# Altium PCB RGB_SL.PcbDoc (part 1 of 2)
Units mm, origin at the board's own origin, x right, y up, seen from the top; angles counter-clockwise.
Board outline 50 x 50 mm, 2 copper layers (Top Layer, Bottom Layer); 48 components, 35 nets, 139 pads, 27 vias.
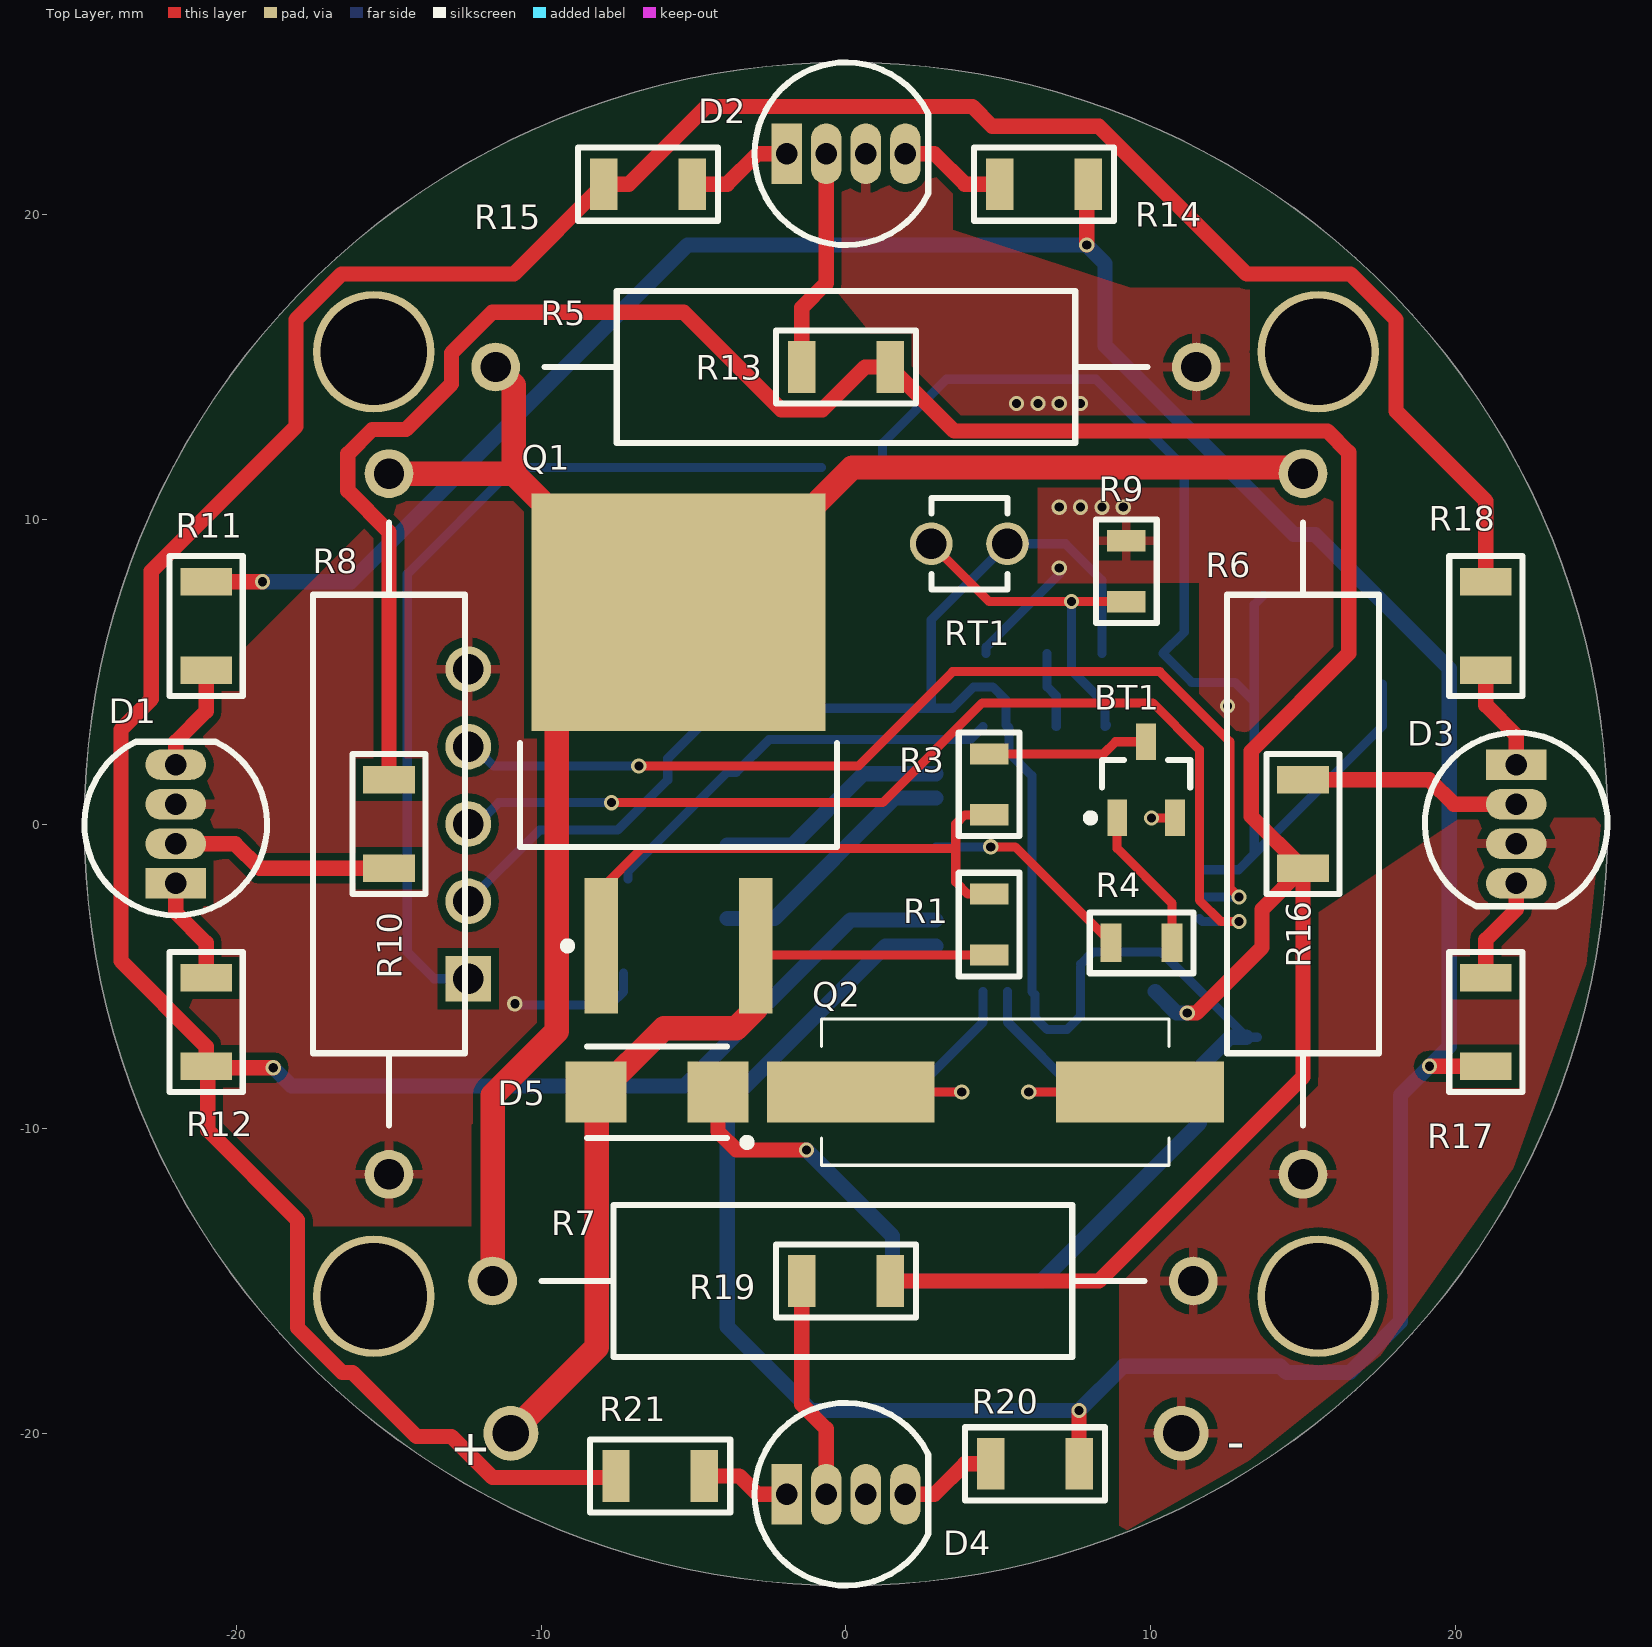
[diagram p0: Top Layer view]
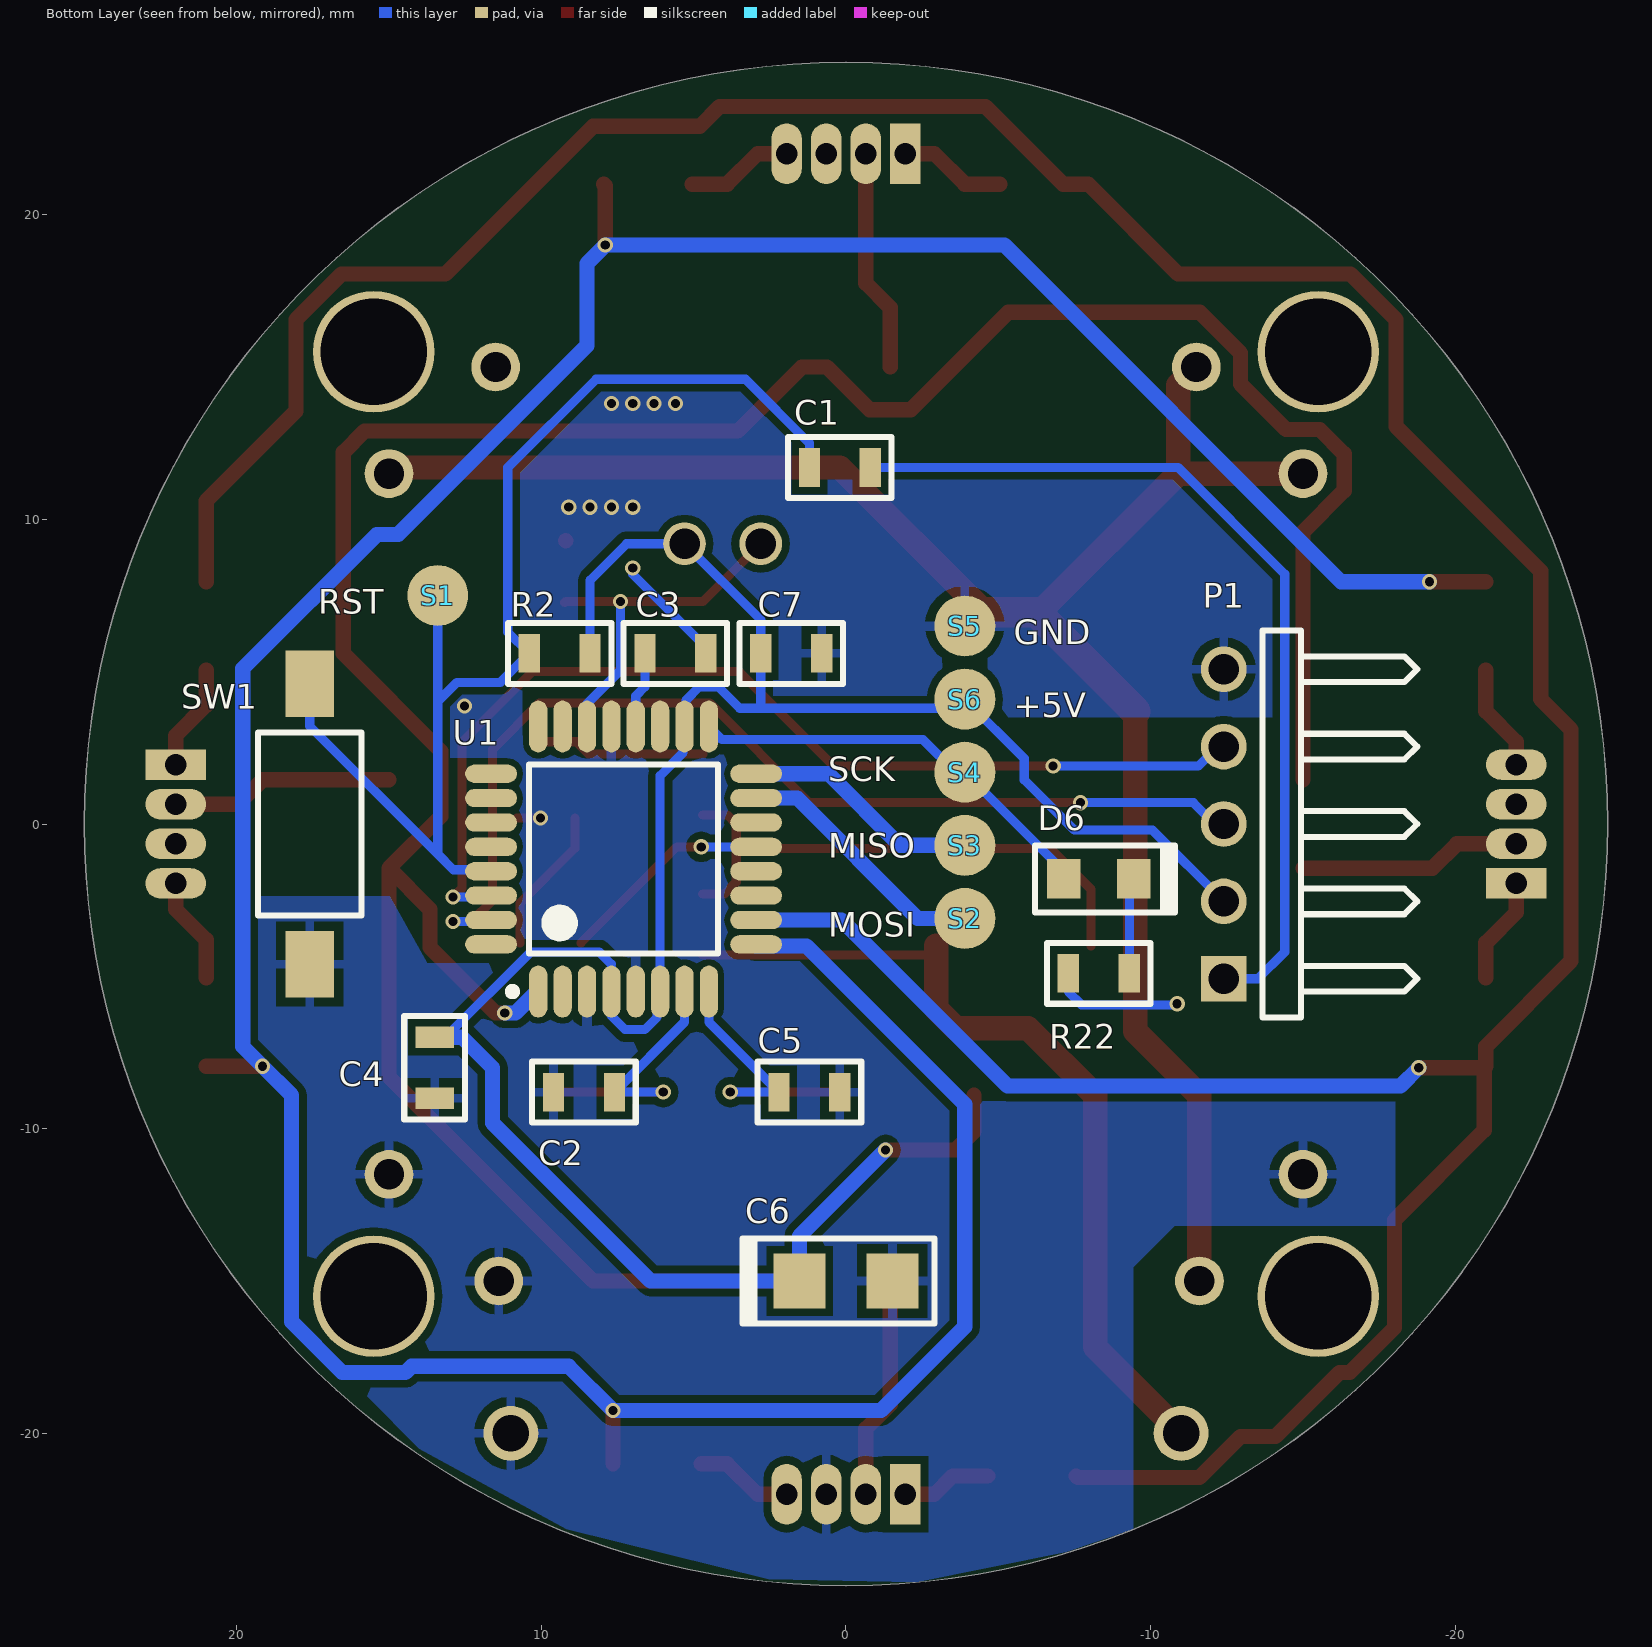
[diagram p1: Bottom Layer view, seen from below]

## Layer stack, top to bottom
Top Solder: solder mask 0.0102, Solder Resist, Dk 3.5
Top Layer: signal copper 0.0356
Dielectric 1: dielectric 0.32, FR-4, Dk 4.8
Bottom Layer: signal copper 0.0356
Bottom Solder: solder mask 0.0102, Solder Resist, Dk 3.5

## Board outline
-25,0 ccw(c0,0) 0,-25 ccw(c0,0) 25,0 ccw(c0,0) 0,25 ccw(c0,0)

## Design rules (kind name [scope] priority, off if disabled: settings)
Clearance Clearance_MCU [InComponent('U1')] p1: gap=0.2 ignorepadtopadclearanceinfootprint=FALSE
Clearance [All] p2: gap=0.25 ignorepadtopadclearanceinfootprint=FALSE
MinimumSolderMaskSliver [All] p1: minsoldermaskwidth=0.2
PolygonConnect [All] p1: thpad.connectstyle=Relief thpad.reliefconductorwidth=0.3 thpad.reliefentries=4 thpad.polygonreliefangle="90 Angle" thpad.airgapwidth=0.3 smdpad.connectstyle=Relief smdpad.reliefconductorwidth=0.3 smdpad.reliefentries=4 smdpad.polygonreliefangle="90 Angle" smdpad.airgapwidth=0.3 via.connectstyle=Direct via.reliefconductorwidth=0.254 via.reliefentries=4 via.polygonreliefangle="90 Angle" via.airgapwidth=0.254
RoutingVias [All] p1: holewidth=0.3 width=0.5 viastyle="Through Hole" minholewidth=0.3 minwidth=0.5 maxholewidth=0.3 maxwidth=0.5
SilkToSilkClearance [All] p1: silktosilkclearance=0
SilkToSolderMaskClearance [IsPad] p1: minsilkscreentomaskgap=0.2 clearancetoexposedcopper=TRUE
SolderMaskExpansion [All] p1: expansion=0.102
Width [All] p1: maxlimit=0.8 minlimit=0.3 preferedwidth=0.3
27 further rules are at their usual default settings.

## Components (designator, comment, footprint, x,y, rotation, side; value= is the part's Value field where it differs from the comment)
BT1 "BC847" SOT95P240X100-3M 9.85,1.45 r90 top
C1 "0.1uF" "0805 CERAMIC CAPACITOR" 0.2,11.7 r180 bottom
C2 "22pF" "0805 CERAMIC CAPACITOR" 8.6,-8.8 r180 bottom
C3 "0.1uF" "0805 CERAMIC CAPACITOR" 5.6,5.6 r0 bottom
C4 "0.1uF" "0805 CERAMIC CAPACITOR" 13.5,-8 r90 bottom
C5 "22pF" "0805 CERAMIC CAPACITOR" 1.2,-8.8 r0 bottom
C6 "10uF 6.3V" "CAP MP3216X16M" 0,-15 r180 bottom
C7 "0.1uF" "0805 Ceramic Capacitor" 1.8,5.6 r0 bottom
D1 "LED RGB" "LED RGB" -22,0 r90 top
D2 "LED RGB" "LED RGB" 0,22 r0 top
D3 "LED RGB" "LED RGB" 22,0 r270 top
D4 "LED RGB" "LED RGB" 0,-22 r0 top
D5 "MBRA210LT3G" DIOM4326X22M -6.2,-8.8 r180 top
D6 "GREEN" "LED G" -8.3,-1.8 r180 bottom
P1 "Header 5H" HDR1X5H -12.4,0 r90 bottom
Q1 "MOSFET P-Ch" DPAK254P1524X483-3M -5.5,2.3 r90 top
Q2 "16MHz" CRYSTAL 4.9,-8.8 r180 top
R1 "4k7" "0805 RES" 4.7,-3.3 r270 top
R2 "10K" "0805 RES" 9.4,5.6 r0 bottom
R3 "1K" "0805 RES" 4.7,1.3 r270 top
R4 "10K" "0805 RES" 9.7,-3.9 r0 top
R5 "2W 11R" "RES T/H 2W" 11.5,15 r180 top
R6 "2W 11R" "RES T/H 2W" 15,-11.5 r90 top
R7 "2W 11R" "RES T/H 2W" 11.4,-15 r180 top
R8 "2W 11R" "RES T/H 2W" -15,-11.5 r90 top
R9 "100K" "0805 RES" 9.2,8.3 r270 top
R10 "270R" "1206 RES" -15,0 r90 top
R11 "100R" "1206 RES" -21,6.5 r90 top
R12 "100R" "1206 RES" -21,-6.5 r270 top
R13 "270R" "1206 RES" 0,15 r0 top
R14 "100R" "1206 RES" 6.5,21 r0 top
R15 "100R" "1206 RES" -6.5,21 r180 top
R16 "270R" "1206 RES" 15,0 r270 top
R17 "100R" "1206 RES" 21,-6.5 r270 top
R18 "100R" "1206 RES" 21,6.5 r90 top
R19 "270R" "1206 RES" 0,-15 r0 top
R20 "100R" "1206 RES" 6.2,-21 r0 top
R21 "100R" "1206 RES" -6.1,-21.4 r180 top
R22 "510R" "0805 RES" -8.3,-4.9 r180 bottom
RT1 "100K" THERMISTOR 2.8,9.2 r0 top
S1 "RST" "TEST PAD" 13.4,7.5 r0 bottom
S2 "MOSI" "TEST PAD" -3.9,-3.1 r0 bottom
S3 "MISO" "TEST PAD" -3.9,-0.7 r0 bottom
S4 "SCK" "TEST PAD" -3.9,1.7 r0 bottom
S5 "GND" "TEST PAD" -3.9,6.5 r0 bottom
S6 "+5V" "TEST PAD" -3.9,4.1 r0 bottom
SW1 "RESET" SWITCH 17.6,0 r90 bottom
U1 "Atmega328P" TQFP80P900X900X120-32M 7.3,-1.15 r90 bottom

## Footprints (in the part's own frame and the unit in brackets; to place one, negate y for a bottom-side part, rotate by r counter-clockwise, add the part's x,y. Pads: shape width x height; smd on the part's side, far side on the other; paste and mask are expansions set on the pad)
"0805 CERAMIC CAPACITOR" [mm]
  rect 0.7x1.27 smd: 1(-1,0) 2(1,0)
  silkscreen extent -1.7,-1 1.7,1, body extent -1,-0.65 1,0.65, height 0.8
"0805 Ceramic Capacitor" [mm]
  rect 0.7x1.27 smd: 1(-1,0) 2(1,0)
  silkscreen extent -1.7,-1 1.7,1, body extent -1,-0.65 1,0.65, height 0.8
"0805 RES" [mm]
  rect 0.7x1.27 smd: 1(-1,0) 2(1,0)
  silkscreen extent -1.7,-1 1.7,1, body extent -1,-0.65 1,0.65, height 0.8
"1206 RES" [mm]
  rect 0.9x1.7 smd: 1(-1.45,0) 2(1.45,0)
  silkscreen extent -2.3,-1.2 2.3,1.2, body extent -1.6,-0.7 1.5,0.8, height 0.55
"CAP MP3216X16M" [mm] "Molded Capacitor, 2-Leads, Body 3.20x1.60mm, IPC Low Density"
  rect 1.7x1.8 smd: 1(-1.525,0) 2(1.525,0)
  silkscreen extent -3.4,-1.5 2.9,1.5, body extent -1.92,-0.9 1.92,0.9, height 1.6
CRYSTAL [mm]
  rect 5.5x2 smd: 1(-4.75,0) 2(4.75,0)
  silkscreen extent -5.7,-2.4 5.7,2.4, body extent -6.7,-2.45 6.7,2.45, height 3.2
DIOM4326X22M [mm] "Molded Diode, 2-Leads, Body 4.31x2.60mm, IPC Low Density"
  rect 2x2 smd: 1(-2,0) 2(2,0)
  silkscreen extent -3.08,-1.5 2.3,1.77, body extent -2.5,-1.46 2.5,1.46, height 2.2
DPAK254P1524X483-3M [mm] "D2-PAK, 3-Pads, Body 7.93x8.57mm (max), IPC Low Density"
  rect 4.45x1.1 smd: 1(-6.3,2.54) 3(-6.3,-2.54)
  rect 7.8x9.65 smd: 4(4.65,0)
  silkscreen extent -6.42,-5.2 0.35,5.2, body extent -6.98,-5.2 8.26,5.2, height 4.83
HDR1X5H [mm] "Connector; Header; 5 Position; Right Angle"
  rect 1.5x1.5 hole 1: 1(-5.08,0)
  round 1.5 hole 1: 2(-2.54,0) 3(0,0) 4(2.54,0) 5(5.08,0)
  silkscreen extent -6.35,-6.35 6.35,-1.27, body extent -6.28,-9.6 6.22,0.2, height 2.5
"LED G" [mm]
  rect 1.1x1.3 smd: 1(-1.15,0) 2(1.15,0)
  silkscreen extent -2.1,-1.1 2.5,1.1, body extent -1.02,-0.65 1.02,0.64, height 1.1
"LED RGB" [mm]
  rect 1x2 hole 0.7: 1(-1.95,0)
  oval 1x2 hole 0.7: 2(-0.65,0) 3(0.65,0) 4(1.95,0)
  silkscreen extent -3,-3 2.7,3, body extent -3.05,-3.05 3.05,3.05, height 12.65
"RES T/H 2W" [mm]
  round 1.6 hole 1: 1(0,0) 2(23,0)
  silkscreen extent 1.6,-2.5 21.4,2.5, body extent -0.5,-4 23.5,3.99, height 12
SOT95P240X100-3M [mm] "SOT23, 3-Leads, Body 2.90x2.40mm, Pitch 0.95mm, IPC Low Density"
  rect 1.2x0.65 smd: 1(-1.25,0.95) 2(-1.25,-0.95) 3(1.25,0)
  silkscreen extent -1.37,-1.45 0.65,1.95, body extent -1.2,-1.45 1.2,1.45, height 1
SWITCH [mm]
  rect 2.18x1.6 smd: 1(-4.6,0) 2(4.6,0)
  silkscreen extent -3,-1.7 3,1.7, body extent -4.7,-1.8 4.7,1.8, height 4.1
"TEST PAD" [mm]
  round 2 smd: 1(0,0)
THERMISTOR [mm]
  round 1.4 hole 1: 1(0,0) 2(2.5,0)
  silkscreen extent 0,-1.5 2.5,1.5, body extent -0.2,-1.15 2.8,1.15, height 11.15
TQFP80P900X900X120-32M [mm] "TQFP, 32-Leads, Body 7.00x7.00mm, Pitch 0.80mm, IPC Low Density"
  oval 1.7x0.6 smd: 1(-4.35,2.8) 2(-4.35,2) 3(-4.35,1.2) 4(-4.35,0.4) 5(-4.35,-0.4) 6(-4.35,-1.2) 7(-4.35,-2) 8(-4.35,-2.8) 17(4.35,-2.8) 18(4.35,-2) 19(4.35,-1.2) 20(4.35,-0.4) 21(4.35,0.4) 22(4.35,1.2) 23(4.35,2) 24(4.35,2.8)
  oval 0.6x1.7 smd: 9(-2.8,-4.35) 10(-2,-4.35) 11(-1.2,-4.35) 12(-0.4,-4.35) 13(0.4,-4.35) 14(1.2,-4.35) 15(2,-4.35) 16(2.8,-4.35) 25(2.8,4.35) 26(2,4.35) 27(1.2,4.35) 28(0.4,4.35) 29(-0.4,4.35) 30(-1.2,4.35) 31(-2,4.35) 32(-2.8,4.35)
  silkscreen extent -4.47,-3.1 3.1,3.77, body extent -4.5,-4.5 4.5,4.5, height 1.2

## Part data
BT1: library part BC847AE6327, "Trans NPN 45V 0.1A Automotive 3-Pin SOT-23 T/R GP BJT", Case/Package=SOT-23-3, Collector Base Voltage (VCBO)=50V, Collector Emitter Breakdown Voltage=45V, Collector Emitter Voltage (VCEO)=600mV, Current Rating=100mA, Emitter Base Voltage (VEBO)=6V, Frequency=250MHz, Manufacturer=Infineon, Max Operating Temperature=150°C, Max Power Dissipation=330mW, Min Operating Temperature=-65°C, Supplier Part Number 1=BC847AE6327HTSA1CT-ND, Category=Transistors, ComponentLink1Description=http://www.infineon.com/dgdl/bc847series_bc848series_bc849series_bc850series.pdf?folderId=db3a304314dca389011541d30fa21656&fileId=db3a304314dca389011541d4630a1657&src-supplier=Avnet, ComponentLink1URL=http://www.infineon.com/dgdl/bc847series_bc848series_bc849series_bc850series.pdf?folderId=db3a304314dca389011541d30fa21656&fileId=db3a304314dca389011541d4630a1657&src-supplier=Avnet, ComponentLink2Description=http://www.mouser.com/ds/2/196/bc847series_bc848series_bc849series_bc850series-55535.pdf?src-supplier=Mouser, ComponentLink2URL=http://www.mouser.com/ds/2/196/bc847series_bc848series_bc849series_bc850series-55535.pdf?src-supplier=Mouser, ComponentLink3Description=https://www.infineon.com/dgdl/Infineon-BC847SERIES_BC848SERIES_BC849SERIES_BC850SERIES-DS-v01_01-en.pdf?fileId=db3a304314dca389011541d4630a1657&src-supplier=Digi-Key, ComponentLink3URL=https://www.infineon.com/dgdl/Infineon-BC847SERIES_BC848SERIES_BC849SERIES_BC850SERIES-DS-v01_01-en.pdf?fileId=db3a304314dca389011541d4630a1657&src-supplier=Digi-Key, ComponentLink4Description=http://components.arrow.com/part/dataview/53356285S7690205N2051?src-supplier=Arrow, ComponentLink4URL=http://components.arrow.com/part/dataview/53356285S7690205N2051?src-supplier=Arrow, ComponentLink5Description=http://components.arrow.com/part/dataview/0323_00171840?src-supplier=Arrow+Europe, ComponentLink5URL=http://components.arrow.com/part/dataview/0323_00171840?src-supplier=Arrow+Europe, ComponentLink6Description=https://www.verical.com/server-webapp/html/getDatasheet?partID=730888&src-supplier=Verical, ComponentLink6URL=https://www.verical.com/server-webapp/html/getDatasheet?partID=730888&src-supplier=Verical, Halogen Free="Not Halogen Free", Lead Free="Lead Free", Manufacturer Part Number=BC847AE6327, Max Breakdown Voltage=45V, Max Collector Current=100mA, Mount="Surface Mount", Number of Elements=1, Number of Pins=3, Packaging="Tape and Reel", Polarity=NPN, Power Dissipation=330mW, Pricing 1="1=0.19, 10=0.175, 100=0.0951, 500=0.0585, 1000=0.0399 (USD)", Radiation Hardening=No, Stock 1=58887, Supplier 1=Digi-Key, Transition Frequency=250MHz, Voltage Rating (DC)=45V
C1 C3 C4: library part VJ0805Y104KXAAT, "Multilayer Ceramic Capacitors MLCC - SMD/SMT .1uF 50volts 10%", Capacitance=100nF, Case/Package=0805, Case Code (Metric)=2012, Dielectric=X7R, Manufacturer="Vishay Vitramon", Max Operating Temperature=125°C, Min Operating Temperature=-55°C, Package Quantity=1, Supplier Part Number 1=720-1383-1-ND, Tolerance=10%, Voltage=50V, Case Code (Imperial)=0805, Category=Capasitors, ComponentLink1Description=http://www.mouser.com/ds/2/427/vjcommercialseries-222796.pdf?src-supplier=Mouser, ComponentLink1URL=http://www.mouser.com/ds/2/427/vjcommercialseries-222796.pdf?src-supplier=Mouser, ComponentLink2Description=http://www.vishay.com/docs/45199/vjcommercialseries.pdf?src-supplier=Digi-Key, ComponentLink2URL=http://www.vishay.com/docs/45199/vjcommercialseries.pdf?src-supplier=Digi-Key, ComponentLink3Description=http://www.vishay.com/docs/45199/vjcommercialseries.pdf?src-supplier=Future+Electronics, ComponentLink3URL=http://www.vishay.com/docs/45199/vjcommercialseries.pdf?src-supplier=Future+Electronics, Depth=1.25mm, Height=1.45mm, Lead Free="Lead Free", Length=2mm, Manufacturer Part Number=VJ0805Y104KXAAT, Mount="Surface Mount", Packaging="Tape and Reel", Pricing 1="1=0.34, 10=0.234, 100=0.1404, 500=0.1053, 1000=0.0889 (USD)", Radiation Hardening=No, REACH SVHC=Unknown, Stock 1=151633, Supplier 1=Digi-Key, Termination=SMD/SMT, Thickness=0.057inch, Voltage Rating=50V, Voltage Rating (DC)=50V, Weight=0.000194oz, Width=0.049inch
C2 C5: library part VJ0805A220JXACW1BC, "0805 22 pF 50 V ±5 % Tolerance C0G/NP0 SMT Multilayer Ceramic Chip Capacitor", Case/Package=0805, Case Code (Metric)=2012, Dielectric=C0G, Dielectric Material=Tantalum, Manufacturer=Vishay, Max Operating Temperature=125°C, Min Operating Temperature=-55°C, Package Quantity=4000, Supplier Part Number 1=720-1601-1-ND, Temperature Coefficient=0ppm/°C, Tolerance=5%, Voltage Rating=50V, Capacitance=22pF, Case Code (Imperial)=0805, Category=Capasitors, ComponentLink1Description=http://www.vishay.com/docs/28548/vjw1bcbascomseries.pdf?src-supplier=Future+Electronics, ComponentLink1URL=http://www.vishay.com/docs/28548/vjw1bcbascomseries.pdf?src-supplier=Future+Electronics, ComponentLink2Description=http://www.vishay.com/docs/28548/vjw1bcbascomseries.pdf?src-supplier=Digi-Key, ComponentLink2URL=http://www.vishay.com/docs/28548/vjw1bcbascomseries.pdf?src-supplier=Digi-Key, Depth=1.25mm, Height=1.45mm, Lead Free="Lead Free", Length=2mm, Manufacturer Part Number=VJ0805A220JXACW1BC, Mount="Surface Mount", Number of Pins=2, Packaging="Tape and Reel", Pricing 1="1=0.19, 10=0.13, 100=0.0661, 500=0.0452, 1000=0.04 (USD)", Radiation Hardening=No, Stock 1=7193, Supplier 1=Digi-Key, Termination=SMD/SMT, Thickness=0.03inch, Voltage Rating (DC)=50V, Width=1.25mm
C6: library part 293D106X96R3A2TE3, "CAP TANT 10UF 6.3V 10% 1206", Capacitance=10uF, Case/Package=1206, Case Code (Metric)=3216, Dielectric Material=Tantalum, ESR (Equivalent Series Resistance)=3.4R, Leakage Current=600nA, Manufacturer="Vishay Sprague", Max Operating Temperature=125°C, Min Operating Temperature=-55°C, Package Quantity=1, Ripple Current=150mA, Supplier Part Number 1=718-1126-1-ND, Tolerance=10%, Voltage=6.3V, Case Code (Imperial)=1206, Category=Capacitors, ComponentLink1Description=http://www.vishay.com/docs/40002/293d.pdf?src-supplier=Avnet, ComponentLink1URL=http://www.vishay.com/docs/40002/293d.pdf?src-supplier=Avnet, ComponentLink2Description=http://www.farnell.com/datasheets/2045658.pdf?src-supplier=Element14, ComponentLink2URL=http://www.farnell.com/datasheets/2045658.pdf?src-supplier=Element14, ComponentLink3Description=http://documents.rs-components.com/techlib://itc_doclist_GB.htm?stockno=6843913&src-supplier=RSComponents, ComponentLink3URL=http://documents.rs-components.com/techlib://itc_doclist_GB.htm?stockno=6843913&src-supplier=RSComponents, ComponentLink4Description=https://www.alliedelec.com/m/d/7dc9f301682605e5c5665c787edb7bb9.pdf?src-supplier=Allied+Electronics, ComponentLink4URL=https://www.alliedelec.com/m/d/7dc9f301682605e5c5665c787edb7bb9.pdf?src-supplier=Allied+Electronics, ComponentLink5Description=http://www.vishay.com/docs/40002/293d.pdf?src-supplier=Digi-Key, ComponentLink5URL=http://www.vishay.com/docs/40002/293d.pdf?src-supplier=Digi-Key, ComponentLink6Description=http://www.mouser.com/ds/2/427/293d-239871.pdf?src-supplier=Mouser, ComponentLink6URL=http://www.mouser.com/ds/2/427/293d-239871.pdf?src-supplier=Mouser, ComponentLink7Description=http://www.vishay.com/docs/40002/293d.pdf?src-supplier=Avnet+Europe, ComponentLink7URL=http://www.vishay.com/docs/40002/293d.pdf?src-supplier=Avnet+Europe, ComponentLink8Description=http://www.farnell.com/datasheets/438417.pdf?src-supplier=Element14, ComponentLink8URL=http://www.farnell.com/datasheets/438417.pdf?src-supplier=Element14, Depth=1.6mm, Dissipation Factor=6%, Features="General Purpose", Height=1.6mm, Height - Seated (Max)=0.071inch, Lead Free="Lead Free", Length=3.2mm, Manufacturer Part Number=293D106X96R3A2TE3, Mount="Surface Mount,PCB", Packaging="Tape and Reel", Polarity=Polar, Pricing 1="1=0.3, 10=0.212, 100=0.127, 500=0.0952, 1000=0.0804 (USD)", Q Factor=6, Radiation Hardening=No, REACH SVHC=Unknown, Stock 1=57716, Supplier 1=Digi-Key, Termination=SMD/SMT, Voltage Rating=6.3V, Voltage Rating (DC)=6.3V, Width=1.6mm
C7: library part VJ0805Y104KXAAT, "Ceramic Cap 0.1uF 50 V 10% MLCC - SMD/SMT", Capacitance=100nF, Case/Package=0805, Case Code (Metric)=2012, Dielectric=X7R, Manufacturer="Vishay Vitramon", Max Operating Temperature=125°C, Min Operating Temperature=-55°C, Package Quantity=1, Supplier Part Number 1=720-1383-1-ND, Tolerance=10%, Voltage=50V, Case Code (Imperial)=0805, Category=Capasitors, ComponentLink1Description=http://www.mouser.com/ds/2/427/vjcommercialseries-222796.pdf?src-supplier=Mouser, ComponentLink1URL=http://www.mouser.com/ds/2/427/vjcommercialseries-222796.pdf?src-supplier=Mouser, ComponentLink2Description=http://www.vishay.com/docs/45199/vjcommercialseries.pdf?src-supplier=Digi-Key, ComponentLink2URL=http://www.vishay.com/docs/45199/vjcommercialseries.pdf?src-supplier=Digi-Key, ComponentLink3Description=http://www.vishay.com/docs/45199/vjcommercialseries.pdf?src-supplier=Future+Electronics, ComponentLink3URL=http://www.vishay.com/docs/45199/vjcommercialseries.pdf?src-supplier=Future+Electronics, Depth=1.25mm, Height=1.45mm, Lead Free="Lead Free", Length=2mm, Manufacturer Part Number=VJ0805Y104KXAAT, Mount="Surface Mount", Packaging="Tape and Reel", Pricing 1="1=0.34, 10=0.234, 100=0.1404, 500=0.1053, 1000=0.0889 (USD)", Radiation Hardening=No, REACH SVHC=Unknown, Stock 1=151633, Supplier 1=Digi-Key, Termination=SMD/SMT, Thickness=0.057inch, Voltage Rating=50V, Voltage Rating (DC)=50V, Weight=0.000194oz, Width=0.049inch
D1 D2 D3 D4: library part HV-5RGB25, "LED RGB DIFFUSED 5MM T/H", Case/Package=Radial, Color=Blue,Green,Red, Forward Voltage=3.4V, Lens Color=Colorless, Manufacturer=Inolux, Supplier Part Number 1=1830-1015-ND, Test Current=20mA, Category=Optoelectronics, ComponentLink1Description=http://www.inolux-corp.com/datasheet/Inolux%20Lamp/TH%20Lamp/HV-5RGBXX%205mm%20Full-Color%20Series.pdf?src-supplier=Digi-Key, ComponentLink1URL=http://www.inolux-corp.com/datasheet/Inolux%20Lamp/TH%20Lamp/HV-5RGBXX%205mm%20Full-Color%20Series.pdf?src-supplier=Digi-Key, Dominant Wavelength=470nm, Element Configuration="Common Cathode", Height=8.9mm, Lens Size=5mm, Lens Style=Round,Domed, Lens Transparency=Clear, Luminous Intensity=2000mcd, Manufacturer Part Number=HV-5RGB25, Mount="Through Hole", Packaging=Bulk, Pricing 1="1=1.02, 10=0.829, 100=0.51, 500=0.4335, 1000=0.357, 2500=0.3392, 5000=0.3315, 10000=0.3239, 25000=0.3188 (USD)", Stock 1=3004, Supplier 1=Digi-Key, Viewing Angle=25°
D5: "DIODE SCHOTTKY 10V 2A SMA", Average Rectified Current=2A, Case/Package=SMA, Forward Voltage=350mV, Manufacturer="ON Semiconductor", Max Forward Surge Current (Ifsm)=160A, Max Operating Temperature=125°C, Max Repetitive Reverse Voltage (Vrrm)=10V, Max Reverse Leakage Current=700uA, Min Operating Temperature=-55°C, Package Quantity=1, Supplier Part Number 1=MBRA210LT3GOSCT-ND, Category=Diodes, ComponentLink1Description=http://www.onsemi.com/pub/Collateral/MBRA210LT3-D.PDF?src-supplier=Digi-Key, ComponentLink1URL=http://www.onsemi.com/pub/Collateral/MBRA210LT3-D.PDF?src-supplier=Digi-Key, ComponentLink2Description=http://www.mouser.com/ds/2/308/MBRA210LT3-D-76406.pdf?src-supplier=Mouser, ComponentLink2URL=http://www.mouser.com/ds/2/308/MBRA210LT3-D-76406.pdf?src-supplier=Mouser, ComponentLink3Description=http://www.farnell.com/datasheets/1796182.pdf?src-supplier=Element14, ComponentLink3URL=http://www.farnell.com/datasheets/1796182.pdf?src-supplier=Element14, ComponentLink4Description=http://www.onsemi.com/pub/Collateral/MBRA210LT3-D.PDF?src-supplier=Avnet, ComponentLink4URL=http://www.onsemi.com/pub/Collateral/MBRA210LT3-D.PDF?src-supplier=Avnet, ComponentLink5Description=http://www.onsemi.com/pub/Collateral/MBRA210LT3-D.PDF?src-supplier=Future+Electronics, ComponentLink5URL=http://www.onsemi.com/pub/Collateral/MBRA210LT3-D.PDF?src-supplier=Future+Electronics, Contact Plating=Tin,Matte, Current Rating=2A, Element Configuration=Single, Forward Current=2A, Halogen Free="Halogen Free", Height=2.05mm, Lead Free="Lead Free", Length=4.57mm, Manufacturer Part Number=MBRA210LT3G, Max Reverse Voltage (DC)=10V, Max Surge Current=160A, Number of Pins=2, Output Current=2A, Packaging="Tape and Reel", Peak Non-Repetitive Surge Current=160A, Peak Reverse Current=700uA, Polarity=Standard, Pricing 1="1=0.48, 10=0.411, 100=0.3072, 500=0.2413, 1000=0.1865 (USD)", Radiation Hardening=No, REACH SVHC="No SVHC", Stock 1=23902, Supplier 1=Digi-Key, Voltage Rating (DC)=10V, Width=2.92mm
D6: library part CMD17-21VGD/TR8, "LED GREEN DIFFUSED 0805 SMD", Case/Package=0805, Case Code (Metric)=2012, Color=Green, Forward Current=20mA, Forward Voltage=2.1V, Manufacturer="VCC CHML", Max Operating Temperature=85°C, Min Operating Temperature=-40°C, Package Quantity=3000, Power Dissipation=105mW, Reverse Voltage=5V, Supplier Part Number 1=L62505CT-ND, Case Code (Imperial)=0805, Category=Optoelectronics, ComponentLink1Description=http://www.farnell.com/datasheets/2059681.pdf?src-supplier=Element14, ComponentLink1URL=http://www.farnell.com/datasheets/2059681.pdf?src-supplier=Element14, ComponentLink2Description=http://vcclite.com/_pdf/CMD17-21%20Series%20SMT%20LEDs%200805%20Package%20Size.pdf?src-supplier=Future+Electronics, ComponentLink2URL=http://vcclite.com/_pdf/CMD17-21%20Series%20SMT%20LEDs%200805%20Package%20Size.pdf?src-supplier=Future+Electronics, Depth=1.25mm, Height=1.1mm, Illumination Color=Green, Lead Free="Lead Free", Length=2mm, Lens Style=Rectangular,Diffused,Tinted,Colored, Luminous Intensity=7mcd, Manufacturer Part Number=CMD17-21VGD/TR8, Mount="Surface Mount", Number of Elements=1, Number of LEDs=1, Number of Pins=2, Packaging="Tape and Reel", Power Rating=105mW, Pricing 1="1=0.49, 10=0.357, 100=0.2328, 500=0.1674, 1000=0.131 (USD)", REACH SVHC=Unknown, Reverse Voltage (DC)=5V, Stock 1=7282, Supplier 1=Digi-Key, Test Current=20mA, Viewing Angle=140°, Wavelength=570nm, Width=1.25mm
P1: "Header, 5-Pin, Right Angle", LatestRevisionDate=17-Jul-2002, LatestRevisionNote="Re-released for DXP Platform.", Publisher="Altium Limited"
Q1: library part NDP6020P, "MOSFET P-Ch LL FET Enhancement Mode", Case/Package=TO-220AB, Continuous Drain Current (ID)=24A, Current Rating=-24A, Drain to Source Breakdown Voltage=-20V, Drain to Source Resistance=5mR, Drain to Source Voltage (Vdss)=20V, Gate to Source Voltage (Vgs)=8V, Input Capacitance=1.59nF, Manufacturer="ON Semiconductor / Fairchild", Max Operating Temperature=175°C, Max Power Dissipation=60W, Min Operating Temperature=-55°C, On-State Resistance=50mR, Package Quantity=50, Supplier Part Number 1=NDP6020P-ND, Threshold Voltage=-700mV, Category=MOSFETs, ComponentLink1Description=https://www.verical.com/server-webapp/html/getDatasheet?partID=59735&src-supplier=Verical, ComponentLink1URL=https://www.verical.com/server-webapp/html/getDatasheet?partID=59735&src-supplier=Verical, ComponentLink2Description=https://www.fairchildsemi.com/datasheets/ND/NDB6020P.pdf?src-supplier=Avnet, ComponentLink2URL=https://www.fairchildsemi.com/datasheets/ND/NDB6020P.pdf?src-supplier=Avnet, ComponentLink3Description=http://www.fairchildsemi.com/datasheets/ND/NDB6020P.pdf?src-supplier=Digi-Key, ComponentLink3URL=http://www.fairchildsemi.com/datasheets/ND/NDB6020P.pdf?src-supplier=Digi-Key, ComponentLink4Description=http://www.fairchildsemi.com/ds/ND/NDP6020P.pdf?src-supplier=Future+Electronics, ComponentLink4URL=http://www.fairchildsemi.com/ds/ND/NDP6020P.pdf?src-supplier=Future+Electronics, ComponentLink5Description=http://www.fairchildsemi.com/ds/ND/NDB6020P.pdf?src-supplier=Avnet+Europe, ComponentLink5URL=http://www.fairchildsemi.com/ds/ND/NDB6020P.pdf?src-supplier=Avnet+Europe, ComponentLink6Description=http://www.produktinfo.conrad.com/datenblaetter/1200000-1299999/001264959-da-01-en-MOSFET_P_CH_20V_24_NDP6020P_TO_220_3_FSC.pdf?src-supplier=Conrad, ComponentLink6URL=http://www.produktinfo.conrad.com/datenblaetter/1200000-1299999/001264959-da-01-en-MOSFET_P_CH_20V_24_NDP6020P_TO_220_3_FSC.pdf?src-supplier=Conrad, Element Configuration=Single, Fall Time=70ns, Height=16.3mm, Lead Free="Lead Free", Length=10.67mm, Manufacturer Part Number=NDP6020P, Mount="Through Hole", Number of Elements=1, Number of Pins=3, Packaging=Rail/Tube, Power Dissipation=60W, Pricing 1="1=1.73, 10=1.552, 100=1.2475, 500=1.025, 1000=0.8493 (USD)", Radiation Hardening=No, Rds On Max=50mR, REACH SVHC="No SVHC", Rise Time=27ns, Stock 1=4487, Supplier 1=Digi-Key, Turn-Off Delay Time=120ns, Turn-On Delay Time=15ns, Voltage Rating (DC)=-20V, Weight=1.8g, Width=4.7mm
Q2: library part ECS-160-20-5PX-TR, "CRYSTAL 16.0000MHZ 20PF SMD", ESR (Equivalent Series Resistance)=40R, Frequency Stability=50ppm, Frequency Tolerance=30ppm, Load Capacitance=20pF, Manufacturer="ECS International", Max Operating Temperature=70°C, Min Operating Temperature=-10°C, Package Quantity=1000, Supplier Part Number 1=XC1282CT-ND, Category=Crystals, ComponentLink1Description=http://www.ecsxtal.com/store/pdf/partnumber4.pdf?src-supplier=Digi-Key, ComponentLink1URL=http://www.ecsxtal.com/store/pdf/partnumber4.pdf?src-supplier=Digi-Key, ComponentLink2Description=http://www.ecsxtal.com/store/pdf/csm-7x.pdf?src-supplier=Digi-Key, ComponentLink2URL=http://www.ecsxtal.com/store/pdf/csm-7x.pdf?src-supplier=Digi-Key, Frequency=16MHz, Height=0.169inch, Lead Free="Lead Free", Length=0.449inch, Manufacturer Part Number=ECS-160-20-5PX-TR, Mount="Surface Mount", Number of Pins=2, Packaging="Tape and Reel", Pricing 1="1=0.3, 10=0.25, 50=0.2248, 100=0.1997, 500=0.1898 (USD)", Stock 1=5912, Supplier 1=Digi-Key, Termination=SMD/SMT, Tolerance=30ppm, Width=0.189inch
R1: library part CRCW08054K70JNEAC, "RES SMD 4.7K Ohm 5% 1/8W ±200ppm/°C Molded SMD Paper T/R", Case/Package=0805, Manufacturer=Vishay, Power Rating=125mW, Resistance=4.7kR, Supplier Part Number 1=541-4165-1-ND, Tolerance=5%, Category=Resistors, ComponentLink1Description=http://www.vishay.com/docs/28773/crcwce3.pdf?src-supplier=Digi-Key, ComponentLink1URL=http://www.vishay.com/docs/28773/crcwce3.pdf?src-supplier=Digi-Key, ComponentLink2Description=http://datasheet.octopart.com/CRCW08054K70JNEAC-Vishay-datasheet-100063072.pdf?src-supplier=Future+Electronics, ComponentLink2URL=http://datasheet.octopart.com/CRCW08054K70JNEAC-Vishay-datasheet-100063072.pdf?src-supplier=Future+Electronics, Lead Free="Lead Free", Manufacturer Part Number=CRCW08054K70JNEAC, Pricing 1="1=0.1, 10=0.04, 100=0.0164, 1000=0.0074, 2500=0.0064 (USD)", Stock 1=137912, Supplier 1=Digi-Key
R2 R4: library part CRCW080510K0FKTA, "RES SMD 10K OHM 1% 1/8W 0805", Case/Package=0805, Case Code (Metric)=2012, Manufacturer="Vishay Dale", Max Operating Temperature=155°C, Max Power Dissipation=125mW, Min Operating Temperature=-55°C, Package Quantity=5000, Resistance=10kR, Supplier Part Number 1=541-3016-1-ND, Temperature Coefficient=100ppm/°C, Tolerance=1%, Voltage Rating=150V, Case Code (Imperial)=0805, Category=Resistors, ComponentLink1Description=http://www.vishay.com/docs/20008/dcrcw.pdf?src-supplier=Digi-Key, ComponentLink1URL=http://www.vishay.com/docs/20008/dcrcw.pdf?src-supplier=Digi-Key, ComponentLink2Description=http://components.arrow.com/part/dataview/4072655S1681230N6892?src-supplier=Arrow, ComponentLink2URL=http://components.arrow.com/part/dataview/4072655S1681230N6892?src-supplier=Arrow, ComponentLink3Description=http://www.vishay.com/docs/20008/dcrcw.pdf?src-supplier=Avnet, ComponentLink3URL=http://www.vishay.com/docs/20008/dcrcw.pdf?src-supplier=Avnet, ComponentLink4Description=http://www.vishay.com/docs/20008/dcrcw.pdf?src-supplier=Future+Electronics, ComponentLink4URL=http://www.vishay.com/docs/20008/dcrcw.pdf?src-supplier=Future+Electronics, Composition="Thick Film", Contact Plating=Tin,Lead, Depth=1.25mm, Features="Automotive AEC-Q200", Height=0.02inch, Lead Free="Contains Lead", Length=2mm, Manufacturer Part Number=CRCW080510K0FKTA, Military Standard=Not, Mount="Surface Mount", Number of Pins=2, Number of Terminations=2, Packaging="Tape and Reel", Power Dissipation=125mW, Power Rating=125mW, Pricing 1="1=0.15, 10=0.135, 100=0.0521, 1000=0.0229, 2500=0.0198 (USD)", Radiation Hardening=No, REACH SVHC=Unknown, Stock 1=27927, Supplier 1=Digi-Key, Voltage Rating (DC)=150V, Weight=0.000194oz, Width=0.049inch
R3: library part CRCW08051K00FKEA, "RES SMD 1K OHM 1% 1/8W 0805", Case/Package=0805, Case Code (Metric)=2012, Manufacturer="Vishay Dale", Max Operating Temperature=155°C, Min Operating Temperature=-55°C, Package Quantity=5000, Power Rating=125mW, Resistance=1kR, Supplier Part Number 1=541-1.00KCDKR-ND, Temperature Coefficient=100ppm/°C, Tolerance=1%, Voltage Rating=150V, Case Code (Imperial)=0805, Category=Resistors, ComponentLink1Description=http://uk.rs-online.com/webdocs/0d98/0900766b80d98b26.pdf?src-supplier=RSComponents, ComponentLink1URL=http://uk.rs-online.com/webdocs/0d98/0900766b80d98b26.pdf?src-supplier=RSComponents, ComponentLink2Description=http://www.farnell.com/datasheets/2310790.pdf?src-supplier=Element14, ComponentLink2URL=http://www.farnell.com/datasheets/2310790.pdf?src-supplier=Element14, ComponentLink3Description=http://www.vishay.com/docs/20035/dcrcwe3.pdf?src-supplier=Avnet, ComponentLink3URL=http://www.vishay.com/docs/20035/dcrcwe3.pdf?src-supplier=Avnet, ComponentLink4Description=https://www.distrelec.biz/Web/Downloads/a_/en/flD-CRCW-e3_data_en.pdf?mime=application%2Fpdf&src-supplier=Distrelec, ComponentLink4URL=https://www.distrelec.biz/Web/Downloads/a_/en/flD-CRCW-e3_data_en.pdf?mime=application%2Fpdf&src-supplier=Distrelec, ComponentLink5Description=http://www.vishay.com/docs/20035/dcrcwe3.pdf?src-supplier=Future+Electronics, ComponentLink5URL=http://www.vishay.com/docs/20035/dcrcwe3.pdf?src-supplier=Future+Electronics, ComponentLink6Description=http://www.vishay.com/docs/20035/dcrcwe3.pdf?src-supplier=Avnet+Europe, ComponentLink6URL=http://www.vishay.com/docs/20035/dcrcwe3.pdf?src-supplier=Avnet+Europe, Composition="Thick Film", Contact Plating=Tin, Depth=1.25mm, Height=0.45mm, Lead Free="Lead Free", Length=2mm, Manufacturer Part Number=CRCW08051K00FKEA, Military Standard=Not, Number of Pins=2, Packaging="Tape and Reel", Pricing 1="1=0.1, 10=0.066, 100=0.0267, 1000=0.012, 2500=0.0104 (USD)", Radiation Hardening=No, REACH SVHC=Unknown, Stock 1=669031, Supplier 1=Digi-Key, Termination=SMD/SMT, Voltage Rating (DC)=150V, Weight=0.000194oz, Width=1.25mm
R5 R6 R7 R8: library part RR02J11RTB, "RES T/H 11 Ohm 2W 5% ±300ppm/°C Conformal AXL Thru-Hole Ammo Pack", Case/Package=Axial, Manufacturer="TE Connectivity", Max Operating Temperature=155°C, Min Operating Temperature=-55°C, Number of Resistors=1, Package Quantity=1000, Power Rating=2W, Resistance=11R, Supplier Part Number 1=A138257CT-ND, Temperature Coefficient=300ppm/°C, Tolerance=5%, Voltage Rating=500V, Category=Resistors, ComponentLink1Description=http://www.mouser.com/ds/2/418/NG_DS_3-1773449-2_E-734362.pdf?src-supplier=Mouser, ComponentLink1URL=http://www.mouser.com/ds/2/418/NG_DS_3-1773449-2_E-734362.pdf?src-supplier=Mouser, ComponentLink2Description=http://datasheet.octopart.com/RR02J11RTB-TE-Connectivity-datasheet-62056503.pdf?src-supplier=Newark, ComponentLink2URL=http://datasheet.octopart.com/RR02J11RTB-TE-Connectivity-datasheet-62056503.pdf?src-supplier=Newark, ComponentLink3Description=http://datasheet.octopart.com/RR02J11RTB-Tyco-Electronics-datasheet-11120060.pdf?src-supplier=TE+Connectivity, ComponentLink3URL=http://datasheet.octopart.com/RR02J11RTB-Tyco-Electronics-datasheet-11120060.pdf?src-supplier=TE+Connectivity, ComponentLink4Description=http://datasheet.octopart.com/RR02J11RTB-TE-Connectivity-datasheet-14742579.pdf?src-supplier=TE+Connectivity, ComponentLink4URL=http://datasheet.octopart.com/RR02J11RTB-TE-Connectivity-datasheet-14742579.pdf?src-supplier=TE+Connectivity, ComponentLink5Description=http://datasheet.octopart.com/RR02J11RTB-TE-Connectivity-datasheet-12070016.pdf?src-supplier=TE+Connectivity, ComponentLink5URL=http://datasheet.octopart.com/RR02J11RTB-TE-Connectivity-datasheet-12070016.pdf?src-supplier=TE+Connectivity, ComponentLink6Description=http://datasheet.octopart.com/RR02J11RTB-TE-Connectivity-datasheet-11120284.pdf?src-supplier=TE+Connectivity, ComponentLink6URL=http://datasheet.octopart.com/RR02J11RTB-TE-Connectivity-datasheet-11120284.pdf?src-supplier=TE+Connectivity, Composition="Power resistor", Diameter=3.5mm, ELV=Compliant, Length=9mm, Manufacturer Part Number=RR02J11RTB, Mount=Axial, Number of Terminations=2, Packaging=Bulk, Pricing 1="1=0.36, 10=0.308, 25=0.224, 50=0.1626, 100=0.1205, 250=0.0925, 500=0.0729 (USD)", Stock 1=3940, Supplier 1=Digi-Key, Termination=Axial
R9: library part TNPW0805100KFEEA, "RES SMD 100K Ohm 1% 0.2W(1/5W) ±25ppm/C Sulfur Resistant Conformal Coated Pad SMD Automotive Medical T/R", Case/Package=0805, Case Code (Metric)=2012, Manufacturer=Vishay, Max Operating Temperature=125°C, Min Operating Temperature=-55°C, Power Rating=125mW, Resistance=100kR, Supplier Part Number 1=541-3912-1-ND, Temperature Coefficient=25ppm/°C, Tolerance=1%, Voltage Rating=150V, Case Code (Imperial)=0805, Category=Resistors, ComponentLink1Description=http://www.vishay.com/docs/28758/tnpw_e3.pdf?src-supplier=Avnet, ComponentLink1URL=http://www.vishay.com/docs/28758/tnpw_e3.pdf?src-supplier=Avnet, ComponentLink2Description=http://www.vishay.com/docs/28758/tnpw_e3.pdf?src-supplier=Future+Electronics, ComponentLink2URL=http://www.vishay.com/docs/28758/tnpw_e3.pdf?src-supplier=Future+Electronics, Composition="Thin Film", Contact Plating=Tin, Height=0.45mm, Lead Free="Lead Free", Length=2mm, Manufacturer Part Number=TNPW0805100KFEEA, Packaging="Tape and Reel", Pricing 1="1=0.42, 10=0.319, 100=0.134, 1000=0.0739, 2500=0.0693 (USD)", Radiation Hardening=No, Stock 1=6678, Supplier 1=Digi-Key, Termination=SMD/SMT, Weight=0.000194oz, Width=1.2mm
R10 R13 R16 R19: library part CRCW1206270RFKEAC, "RES SMD 270 OHM 1% 1/4W 1206", Case/Package=Molded, Manufacturer="Vishay Semiconductors", Max Operating Temperature=155°C, Min Operating Temperature=-55°C, Power Rating=250mW, Supplier Part Number 1=541-4192-1-ND, Temperature Coefficient=100ppm/°C, Tolerance=1%, Category=Resistors, ComponentLink1Description=http://www.vishay.com/docs/20035/dcrcwe3.pdf?src-supplier=Avnet+Asia, ComponentLink1URL=http://www.vishay.com/docs/20035/dcrcwe3.pdf?src-supplier=Avnet+Asia, ComponentLink2Description=http://www.vishay.com/docs/28773/crcwce3.pdf?src-supplier=Digi-Key, ComponentLink2URL=http://www.vishay.com/docs/28773/crcwce3.pdf?src-supplier=Digi-Key, Composition="Thick Film", Contact Plating=Tin, Lead Free="Lead Free", Length=3.2mm, Manufacturer Part Number=CRCW1206270RFKEAC, Mount="Surface Mount", Pricing 1="1=0.1, 10=0.077, 100=0.0295, 1000=0.013, 2500=0.0112 (USD)", Resistance=270R, Stock 1=60408, Supplier 1=Digi-Key, Termination=Wraparound
R11 R12 R14 R15 R17 R18 R20 R21: library part CRCW1206100RFKEAC, "RES SMD 100 OHM 1% 1/4W 1206", Case/Package=Molded, Manufacturer="Vishay Semiconductors", Max Operating Temperature=155°C, Min Operating Temperature=-55°C, Power Rating=250mW, Supplier Part Number 1=541-3982-1-ND, Temperature Coefficient=100ppm/°C, Tolerance=1%, Category=Resistors, ComponentLink1Description=http://www.vishay.com/docs/20035/dcrcwe3.pdf?src-supplier=Avnet+Asia, ComponentLink1URL=http://www.vishay.com/docs/20035/dcrcwe3.pdf?src-supplier=Avnet+Asia, ComponentLink2Description=http://www.vishay.com/docs/28773/crcwce3.pdf?src-supplier=Digi-Key, ComponentLink2URL=http://www.vishay.com/docs/28773/crcwce3.pdf?src-supplier=Digi-Key, Composition="Thick Film", Contact Plating=Tin, Lead Free="Lead Free", Length=3.2mm, Manufacturer Part Number=CRCW1206100RFKEAC, Mount="Surface Mount", Pricing 1="1=0.1, 10=0.077, 100=0.0295, 1000=0.013, 2500=0.0112 (USD)", Resistance=100R, Stock 1=85911, Supplier 1=Digi-Key, Termination=Wraparound
R22: library part CRCW0805510RFKEA, "RES SMD 510 OHM 1% 1/8W 0805", Case/Package=0805, Case Code (Metric)=2012, Manufacturer=Vishay, Max Operating Temperature=155°C, Max Power Dissipation=125mW, Min Operating Temperature=-55°C, Package Quantity=10, Supplier Part Number 1=541-510CCT-ND, Temperature Coefficient=100ppm/°C, Tolerance=1%, Voltage Rating=150V, Case Code (Imperial)=0805, Category=Resistors, ComponentLink1Description=http://www.vishay.com/docs/20035/dcrcwe3.pdf?src-supplier=Digi-Key, ComponentLink1URL=http://www.vishay.com/docs/20035/dcrcwe3.pdf?src-supplier=Digi-Key, ComponentLink2Description=http://www.farnell.com/datasheets/2111203.pdf?src-supplier=Element14, ComponentLink2URL=http://www.farnell.com/datasheets/2111203.pdf?src-supplier=Element14, ComponentLink3Description=https://www.distrelec.biz/Web/Downloads/a_/en/flD-CRCW-e3_data_en.pdf?mime=application%2Fpdf&src-supplier=Distrelec, ComponentLink3URL=https://www.distrelec.biz/Web/Downloads/a_/en/flD-CRCW-e3_data_en.pdf?mime=application%2Fpdf&src-supplier=Distrelec, ComponentLink4Description=http://www.vishay.com/docs/20035/dcrcwe3.pdf?src-supplier=Avnet+Europe, ComponentLink4URL=http://www.vishay.com/docs/20035/dcrcwe3.pdf?src-supplier=Avnet+Europe, ComponentLink5Description=https://www.alliedelec.com/m/d/0c934d6939ccefa68dbe0b96d821c8cf.pdf?src-supplier=Allied+Electronics, ComponentLink5URL=https://www.alliedelec.com/m/d/0c934d6939ccefa68dbe0b96d821c8cf.pdf?src-supplier=Allied+Electronics, ComponentLink6Description=http://www.vishay.com/docs/20035/dcrcwe3.pdf?src-supplier=Future+Electronics, ComponentLink6URL=http://www.vishay.com/docs/20035/dcrcwe3.pdf?src-supplier=Future+Electronics, ComponentLink7Description=http://uk.rs-online.com/webdocs/0d98/0900766b80d98b26.pdf?src-supplier=RSComponents, ComponentLink7URL=http://uk.rs-online.com/webdocs/0d98/0900766b80d98b26.pdf?src-supplier=RSComponents, ComponentLink8Description=http://www.mouser.com/ds/2/427/dcrcwe3-109170.pdf?src-supplier=Mouser, ComponentLink8URL=http://www.mouser.com/ds/2/427/dcrcwe3-109170.pdf?src-supplier=Mouser, ComponentLink9Description=http://www.farnell.com/datasheets/2046716.pdf?src-supplier=Element14, ComponentLink9URL=http://www.farnell.com/datasheets/2046716.pdf?src-supplier=Element14, Composition="Thick Film", Contact Plating=Tin, Depth=1.25mm, Features="Automotive AEC-Q200", Height=0.45mm, Lead Free="Lead Free", Length=2mm, Manufacturer Part Number=CRCW0805510RFKEA, Military Standard=Not, Mount="Surface Mount", Number of Terminations=2, Packaging="Tape and Reel", Power Rating=125mW, Pricing 1="1=0.1, 10=0.066, 100=0.0267, 1000=0.012, 2500=0.0104 (USD)", Radiation Hardening=No, REACH SVHC=Unknown, Resistance=510R, Stock 1=23412, Supplier 1=Digi-Key, Termination=SMD/SMT, Voltage Rating (DC)=150V, Weight=0.000194oz, Width=0.049inch
RT1: library part MF52A1104J3950, "THERMISTOR 100K OHM 5% BEAD", Manufacturer="Canadian Thermostats", Max Operating Temperature=125°C, Max Power Dissipation=50mW, Min Operating Temperature=-55°C, Package Quantity=3000, Supplier Part Number 1=317-1264-ND, Tolerance=5%, Category="NTC Thermistors", ComponentLink1Description=http://www.cantherm.com/wp-content/uploads/2017/05/cantherm_mf52_1.pdf?src-supplier=Digi-Key, ComponentLink1URL=http://www.cantherm.com/wp-content/uploads/2017/05/cantherm_mf52_1.pdf?src-supplier=Digi-Key, Manufacturer Part Number=MF52A1104J3950, Mount="Through Hole", Packaging=Bulk, Pricing 1="1=0.45, 5=0.43, 10=0.383, 25=0.3528, 50=0.282, 100=0.2418, 500=0.2116, 1000=0.1814, 5000=0.1612 (USD)", Stock 1=3676, Supplier 1=Digi-Key
S1 S2 S3 S4 S5 S6: library part "Test Pad"
SW1: library part FSMSMTR, "SWITCH TACTILE SPST-NO 0.05A 24V", Case/Package=SMD/SMT, Contact Current Rating=50mA, Contact Resistance=100mR, Manufacturer="TE Connectivity", Max Operating Temperature=85°C, Max Voltage Rating (DC)=12V, Min Operating Temperature=-35°C, Operating Force=180gf, Package Quantity=1800, Supplier Part Number 1=450-1758-6-ND, Voltage Rating (DC)=24V, Actuator Length=1.07mm, Actuator Material=Polyamide, Actuator Type=Standard, Category=Switches, ComponentLink1Description=http://www.onlinecomponents.com/productFiles/mf-AO/eng_cat_1308390_0904_e3_e10_.pdf?src-supplier=Onlinecomponents.com, ComponentLink1URL=http://www.onlinecomponents.com/productFiles/mf-AO/eng_cat_1308390_0904_e3_e10_.pdf?src-supplier=Onlinecomponents.com, ComponentLink2Description=https://www.te.com/commerce/DocumentDelivery/DDEController?Action=srchrtrv&DocNm=1437566-3&DocType=Customer+Drawing&DocLang=English&src-supplier=Digi-Key, ComponentLink2URL=https://www.te.com/commerce/DocumentDelivery/DDEController?Action=srchrtrv&DocNm=1437566-3&DocType=Customer+Drawing&DocLang=English&src-supplier=Digi-Key, Contact Material=Brass, Contact Plating=Silver, Current Rating=50mA, Electrical Life=20000Cycles, ELV=Compliant, Illumination Type=Non-Illuminated,Illuminated, Lead Free="Lead Free", Manufacturer Part Number=FSMSMTR, Max Current Rating=50mA, Mechanical Life=20000Cycles, Mount="Surface Mount", Orientation=Straight, Packaging="Tape and Reel", Pricing 1="1=0.47, 10=0.45, 25=0.442, 50=0.4254, 100=0.367, 250=0.3336, 500=0.317 (USD)", Radiation Hardening=No, REACH SVHC=Unknown, Stock 1=20359, Supplier 1=Digi-Key, Switch Function=Off-Mom, Switch Travel=0.25mm, Termination="Gull Wing", Throw Configuration=SPST, Type=Switch
U1: library part ATMEGA328P-AUR, "IC MCU 8BIT 32KB FLASH 32TQFP", Case/Package=TQFP, Frequency=40MHz, Manufacturer=Microchip, Max Operating Temperature=85°C, Min Operating Temperature=-40°C, Supplier Part Number 1=ATMEGA328P-AURCT-ND, Category="Integrated Circuits", Core Architecture=PIC, Interface=I2C,SPI,UART,USART, Manufacturer Part Number=ATMEGA328P-AUR, Memory Size=32KB, Memory Type=FLASH, Number of I/Os=32, Oscillator Type=Internal, Packaging="Cut Tape", Peripherals="Brown-out Detect/Reset,POR,PWM,WDT", Pricing 1="1=2.14, 25=1.9672, 100=1.7819 (USD)", Stock 1=19930, Supplier 1=Digi-Key

## Free pads (board coordinates)
  round 4 hole 3.5: ""(-15.5,-15.5) ""(-15.5,15.5) ""(15.5,-15.5) ""(15.5,15.5)
  round 1.8 hole 1.2: ""(-11,-20) ""(11,-20)

## Via types
v1: diameter 0.5, hole 0.3, Top Layer to Bottom Layer, tented both sides, 27 vias

## Nets (pads, with @x,y where several pads share a name; then routed paths per layer and width w, separated by ;. In a path a pad name is that pad's centre, name@x,y a point inside that pad or via, vN(x,y) a via of type N, cw(c..) or ccw(c..) an arc to the next point about the centre after c; other vN are vias at no path point)
+5: C4.2 C6.1 C7.2 D5.1 P1.2 R2.1 RT1.2 S6.1 U1.4 U1.6 U1.18 | length 81
  Top Layer w0.5: D5.1@-4.2,-8.9 -4.2,-10.1 -3.6,-10.7 v1(-1.3,-10.7)
  Bottom Layer w0.3: P1.2 -10.06,-0.2 -7.5,-0.2 -5.85,1.45 -5.85,2.15 S6.1 -3.6,3.8 2.8,3.8 ; U1.4@7.7,-4.7 U1.4 7.7,-6.3 7.25,-6.75 6.61,-6.75 6.2,-6.34 6.2,-5.6 U1.6 6.1,1.589 5.35,2.339 5.35,3.15 U1.18 5.25,3.25 5.25,4.061 4.811,4.5 4.189,4.5 3.489,3.8 2.8,3.8 ; 7.7,-4.6 8.1,-4.2 10.35,-4.2 13.15,-7 C4.2 ; R2.1 8.4,8 7.2,9.2 RT1.2 2.8,6.7 C7.2 2.8,3.8
  Bottom Layer w0.5: v1(-1.3,-10.7) 1.525,-13.525 C6.1 6.415,-15 11.6,-9.815 11.6,-8 12.6,-7 C4.2@13.14,-7
"+5 Socket": D5.2 pad.@-11,-20 Q1.3 R1.2 | length 28.5
  Top Layer w0.3: Q1.3 -2.66,-4.3 R1.2
  Top Layer w0.8: pad.@-11,-20 -8.175,-17.175 -8.175,-8.9 -5.975,-6.7 -3.6,-6.7 -2.96,-6.06 Q1.3
B: R12.2 R15.2 R18.2 R21.2 U1.10 | length 128.5
  Top Layer w0.5: v1(-18.8,-8) R12.2@-20.95,-8 ; R21.2 -7.6,-21.45 -11.601,-21.45 -12.95,-20.101 -14.099,-20.101 -16.2,-18 -16.536,-18 -18,-16.536 -18,-13 -20.95,-10.05 R12.2@-20.95,-8 ; R18.2 21,10.6 18.05,13.55 18.05,16.556 16.556,18.05 13.15,18.05 8.3,22.9 4.8,22.9 4.15,23.55 -4.578,23.55 -7.128,21 R15.2 -10.9,18.05 -16.556,18.05 -18.05,16.556 -18.05,13.05 -22.8,8.3 -22.8,4.1 -23.8,3.1 -23.8,-4.5 -21,-7.3 R12.2 R12.2@-20.95,-8
  Bottom Layer w0.5: v1(-18.8,-8) -18.2,-8.6 -5.3,-8.6 0.15,-3.15 U1.10
G: R11.2 R14.2 R17.2 R20.2 U1.9 | length 121.4
  Top Layer w0.5: R11.2 v1(-19.15,7.95) ; R20.2 v1(7.65,-19.25) ; v1(7.9,19) 7.9,20.95 R14.2 ; v1(19.15,-7.95) R17.2
  Bottom Layer w0.5: v1(-19.15,7.95) -16.25,7.95 -5.2,19 v1(7.9,19) 8.5,18.4 8.5,15.7 14.7,9.5 15.4,9.5 19.8,5.1 19.8,-7.3 v1(19.15,-7.95) 18.2,-8.9 18.2,-16.336 16.536,-18 14.464,-18 14.264,-17.8 9.1,-17.8 v1(7.65,-19.25) -1.15,-19.25 -3.9,-16.5 -3.9,-9.2 1.3,-4 U1.9@2.95,-4
GND: BT1.2 C2.1 C3.1 C4.1 C5.1 C6.2 C7.1 D1.3 D2.3 D3.3 D4.3 P1.5 pad.@11,-20 R5.1 R6.1 R7.1 R8.1 R9.1 R22.1 S5.1 SW1.1 U1.3 U1.5 U1.21 | length 8.9
  Top Layer w0.3: v1(10.025,0.2) BT1.2
  Bottom Layer w0.3: v1(-10.87,-5.9) -10.835,-5.935 -7.735,-5.935 -7.3,-5.5 R22.1 ; C3.1 4.6,5.8 7,8.2 v1(7,8.4)
  other v1: 12.525,3.875 7,10.4 7.7,10.4 8.4,10.4 9.1,10.4 5.6,13.8 6.3,13.8 7,13.8 7.7,13.8
Heat: R4.1 U1.13 | length 7.1
  Top Layer w0.3: v1(4.75,-0.75) 5.55,-0.75 R4.1
  Bottom Layer w0.3: U1.13 v1(4.75,-0.75)
NetBT1_1: BT1.1 R4.2 | length 4.8
  Top Layer w0.3: BT1.1 8.9,-0.8 10.7,-2.6 R4.2
NetBT1_3: BT1.3 R3.1 | length 5.3
  Top Layer w0.3: R3.1 8.45,2.3 8.85,2.7 BT1.3
NetC1_2: C1.2 P1.1 | length 29.8
  Bottom Layer w0.3: P1.1 -13.52,-5.08 -14.4,-4.2 -14.4,8.2 -10.9,11.7 C1.2
NetC2_2: C2.2 Q2.1 U1.7 | length 9.5
  Top Layer w0.3: v1(6,-8.8) Q2.1
  Bottom Layer w0.3: U1.7 5.3,-6.5 C2.2 v1(6,-8.8)
NetC3_2: C3.2 U1.20 | length 2.5
  Bottom Layer w0.3: C3.2 6.6,4.5 6.9,4.2 U1.20
NetC5_2: C5.2 Q2.2 U1.8 | length 9.5
  Top Layer w0.3: Q2.2 v1(3.8,-8.8)
  Bottom Layer w0.3: v1(3.8,-8.8) C5.2 4.5,-6.5 U1.8
NetD1_1: D1.1 R12.1 | length 3.5
  Top Layer w0.5: D1.1 -22,-2.9 -21,-3.9 R12.1
NetD1_2: D1.2 R10.1 | length 7.3
  Top Layer w0.5: D1.2 -20.05,-0.65 -19.25,-1.45 R10.1
NetD1_4: D1.4 R11.1 | length 3.5
  Top Layer w0.5: D1.4 -22,2.7 -21,3.7 R11.1
NetD2_1: D2.1 R15.1 | length 3.5
  Top Layer w0.5: R15.1 -3.9,21 -2.9,22 D2.1
NetD2_2: D2.2 R13.1 | length 7.3
  Top Layer w0.5: R13.1 -1.45,16.95 -0.65,17.75 D2.2
NetD2_4: D2.4 R14.1 | length 3.5
  Top Layer w0.5: D2.4 2.9,22 3.9,21 R14.1
NetD3_1: D3.1 R18.1 | length 3.5
  Top Layer w0.5: R18.1 21,3.9 22,2.9 D3.1
NetD3_2: D3.2 R16.1 | length 7.3
  Top Layer w0.5: R16.1 19.15,1.45 19.95,0.65 D3.2
NetD3_4: D3.4 R17.1 | length 3.5
  Top Layer w0.5: R17.1 21,-3.8 22,-2.8 D3.4
NetD4_1: D4.1 R21.1 | length 2.9
  Top Layer w0.5: R21.1 -3.5,-21.4 -2.9,-22 D4.1
NetD4_2: D4.2 R19.1 | length 7.3
  Top Layer w0.5: R19.1 -1.45,-19.05 -0.65,-19.85 D4.2
NetD4_4: D4.4 R20.1 | length 3.2
  Top Layer w0.5: D4.4 2.9,-22 3.9,-21 R20.1
NetD6_1: D6.1 S4.1 U1.17 | length 13.9
  Bottom Layer w0.3: D6.1 -7.15,-1.55 S4.1 -3.6,1.7 -2.525,2.775 4.075,2.775 U1.17
NetD6_2: D6.2 R22.2 | length 3.2
  Bottom Layer w0.3: D6.2 -9.3,-1.95 R22.2
NetP1_3: P1.3 U1.31 | length 34.2
  Top Layer w0.3: v1(-7.7,0.7) 1.2,0.7 4.475,3.975 10.066,3.975 11.6,2.441 11.6,-2.5 12.3,-3.2 v1(12.9,-3.2)
  Bottom Layer w0.3: P1.3 -12.1,0 -11.4,0.7 v1(-7.7,0.7) ; U1.31@11.6,-3.1 U1.31 11.7,-3.2 v1(12.9,-3.2)
NetP1_4: P1.4 U1.30 | length 34
  Top Layer w0.3: v1(-6.8,1.9) 0.4,1.9 3.5,5 10.3,5 12.6,2.7 12.6,-2.1 v1(12.9,-2.4)
  Bottom Layer w0.3: P1.4 -12.2,2.54 -11.56,1.9 v1(-6.8,1.9) ; U1.30 11.7,-2.4 v1(12.9,-2.4)
NetQ1_1: Q1.1 R1.1 R3.2 | length 18.4
  Top Layer w0.3: Q1.1 -8.04,-2.14 -6.7,-0.8 3.6,-0.8 ; R1.1 4,-2.3 3.6,-1.9 3.6,-0.8 ; R3.2 3.9,0.3 3.6,0 3.6,-0.8
NetQ1_4: Q1.4 R5.2 R6.2 R7.2 R8.2 | length 61.8
  Top Layer w0.8: R8.2 -10.9,11.5 ; R7.2 -11.6,-8.9 -9.5,-6.8 Q1.4@-9.5,3.7 ; R5.2 -10.9,14.4 -10.9,11.5 ; Q1.4@-6.35,6.95 -10.9,11.5 ; Q1.4@-4.55,6.95 0.2,11.7 R6.2@14.8,11.7
  Top Layer w1: Q1.4@-9.5,3.7 Q1.4@-6.25,6.95 ; Q1.4@-6.35,6.95 Q1.4@-6.25,6.95 ; Q1.4@-4.55,6.95 Q1.4 Q1.4@-6.25,6.95 ; R6.2@14.8,11.7 R6.2
NetR9_2: R9.2 RT1.1 U1.22 | length 11.9
  Top Layer w0.3: RT1.1 4.7,7.3 v1(7.4,7.3) R9.2 R9.2@9.231,7.269
  Bottom Layer w0.3: v1(7.4,7.3) 7.4,5.049 8.5,3.949 U1.22 U1.22@8.55,3.25
NetS2_1: S2.1 U1.15 | length 8.5
  Bottom Layer w0.5: S2.1 -2.35,-3.1 1.6,0.85 U1.15
NetS3_1: S3.1 U1.16 | length 7.8
  Bottom Layer w0.5: S3.1 -1.775,-0.7 0.575,1.65 U1.16
R: R10.2 R13.2 R16.2 R19.2 U1.1 | length 96.4
  Top Layer w0.5: R10.2 -15,9.591 -16.35,10.941 -16.35,12.15 -15.55,12.95 -14.444,12.95 -12.95,14.444 -12.95,15.459 -11.609,16.8 -5.328,16.8 -2.128,13.6 -0.772,13.6 0.628,15 R13.2 3.55,12.9 15.8,12.9 16.5,12.2 16.5,5.6 13.3,2.4 13.3,0.25 R16.2 ; R19.2 8.3,-15 15,-8.3 R16.2 ; v1(11.2,-6.2) 11.5,-6.2 13.65,-4.05 13.65,-2.8 R16.2
  Bottom Layer w0.5: U1.1@10.15,-5.5 10.85,-6.2 v1(11.2,-6.2)
RST: C1.1 R2.2 S1.1 SW1.2 U1.29 | length 40.7
  Bottom Layer w0.3: C1.1 1.2,12.5 3.3,14.6 8.2,14.6 11.1,11.7 11.1,6.3 R2.2 11.35,4.65 12.769,4.65 13.4,4.019 ; U1.29 11.7,-1.5 12.886,-1.5 13.4,-0.986 ; S1.1@13.7,7.5 13.4,7.2 13.4,4.019 ; SW1.2 17.6,3.214 13.4,-0.986 ; 13.4,-0.986 13.4,4.019
pads on no net: U1.2 U1.11 U1.12 U1.14 U1.19 U1.23 U1.24 U1.25 U1.26 U1.27 U1.28 U1.32

## Polygon pours and split planes (outlines as drawn)
GND on Top Layer "GND_L01_P014" (solid, remove dead copper, pour order 14): 11.6,4.2 13.2,2.6 13.692,2.6 16.5,5.2 16.5,11.2 6.3,11.2 6.3,7.9 11.6,7.9
GND on Top Layer "GND_L01_P004" (solid, remove dead copper, pour order 4): -12.3,-13.2 -17.8,-13.2 -23.4,-7.6 -23.4,2.1 -14.9,10.6 -9.95,10.6 -9.95,-8.116 -12.3,-9.866
GND on Top Layer "GND_L01_P000" (solid, remove dead copper, pour order 0): 8.974,-23.334 13.221,-20.903 17.54,-17.448 21.9,-11.3 24.3,-4.6 24.8,0.2 20.148,0.2 15.503,-2.899 15.503,-8.597 8.974,-15.126
GND on Top Layer "GND_L01_P002" (solid, remove dead copper, pour order 2): 13.245,13.1 13.245,17.6 9.348,17.6 3.5,19.5 3.5,22.2 -0.4,22.2 -0.4,17.6 2.1,14.5 3.5,13.1
GND on Bottom Layer "GND_L02_P010" (solid, remove dead copper, pour order 10): 16.2,-18.3 14,-20.5 9.164,-23.152 2.541,-24.787 -2.312,-24.893 -7.19,-23.908 -9.433,-23.152 -9.433,-14.541 -10.785,-13.19 -18.025,-13.19 -18.025,-9.1 -4,-9.1 -4,-16.7 -0.827,-19.248 7.5,-19.2 8.6,-18.3
GND on Bottom Layer "GND_L02_P008" (solid, pour order 8): 19.8,-2.375 19.8,-7.4 18.186,-9.014 18.2,-16.257 16.261,-18.3 8.6,-18.3 7.446,-19.305 -0.993,-19.305 -4,-16.299 -4,-9.3 0.875,-4.425 3.15,-4.425 3.15,2.9 10.625,2.9 10.625,4.875 13.175,4.875 13.175,2.175 11.254,2.175 11.353,-4.575 13.739,-4.575 14.972,-2.375
GND on Bottom Layer "GND_L02_P012" (solid, remove dead copper, pour order 12): -14.4,3.5 -14.4,8.2 -11.3,11.3 1.2,11.3 1.2,12.5 3.4,14.6 8.2,14.6 11.1,11.7 11.1,6.7 8.773,6.7 6.5,9.2 5.3,9.2 2.8,6.7 2.8,3.8 -4.3,3.8 -4.6,3.5

## Silkscreen, mask and mechanical layers (free items; w line width, h text height)
Top Overlay:
  text "-" at 12.5,-20.85 h1.2
  text "+" at -13,-21.05 h1.2
Board Outline: